# Altium PCB ADA.PcbDoc (part 2 of 3)
Units mm, origin at the board's own origin, x right, y up, seen from the top; angles counter-clockwise.
Board outline 200 x 100 mm, 2 copper layers (Top Layer, Bottom Layer); 139 components, 141 nets, 517 pads, 145 vias.
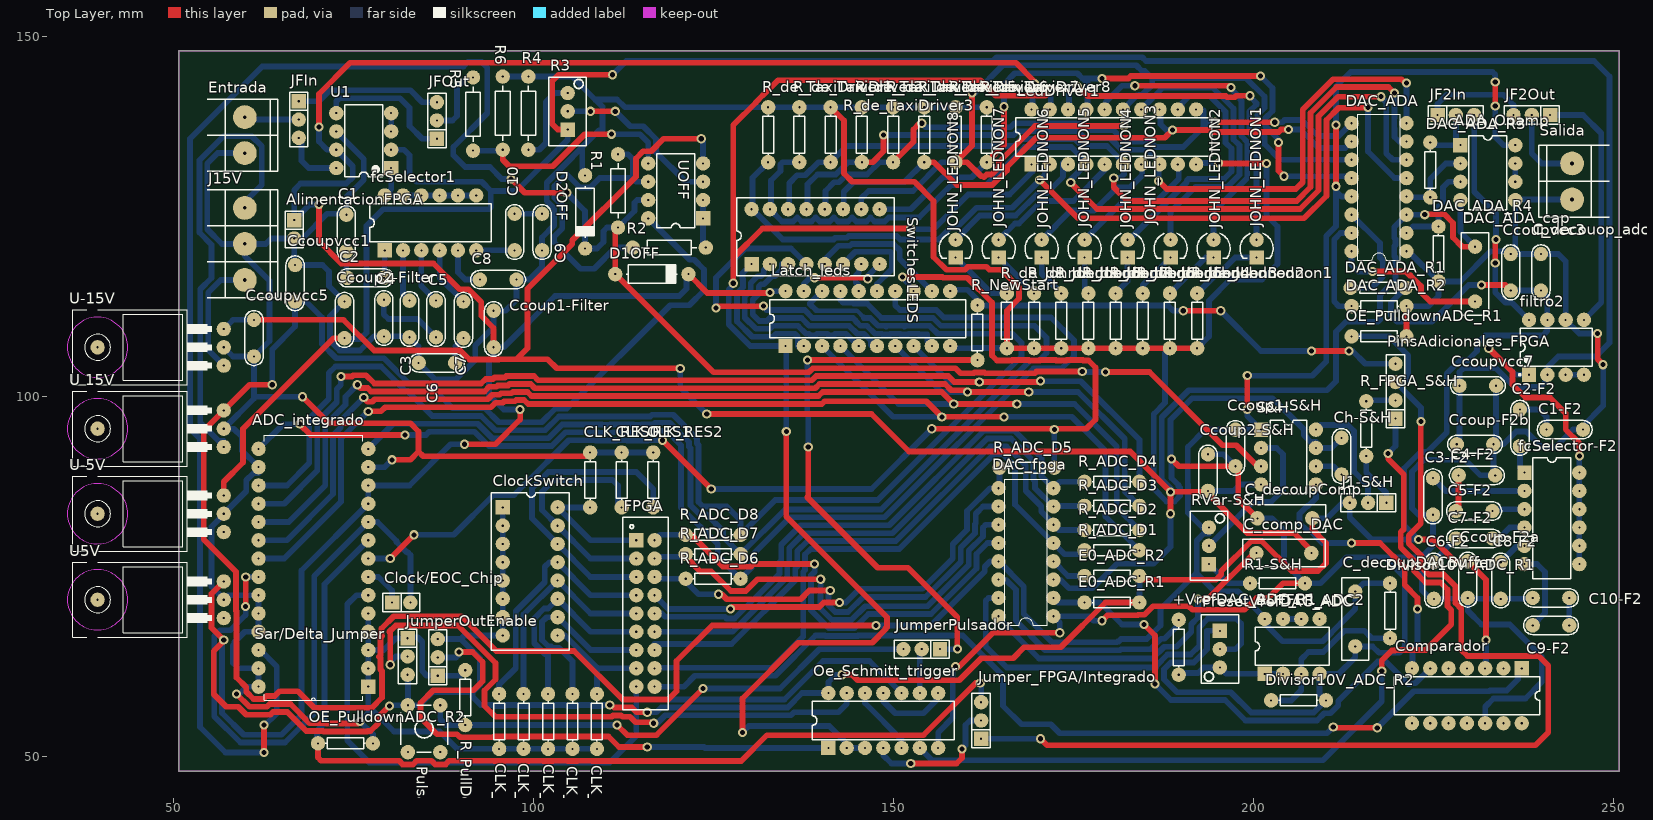
[diagram p0: Top Layer view]

## Via types
v1: diameter 1.27, hole 0.711, Top Layer to Bottom Layer, 145 vias

## Nets (pads, with @x,y where several pads share a name; then routed paths per layer and width w, separated by ;. In a path a pad name is that pad's centre, name@x,y a point inside that pad or via, vN(x,y) a via of type N, cw(c..) or ccw(c..) an arc to the next point about the centre after c; other vN are vias at no path point) (continued)
FPGA_S&H: J1-S&H.1 R_FPGA_S&H.1 | length 7.6
  Bottom Layer w0.8: R_FPGA_S&H.1@215.646,91.694 215.646,89.408 218.44,86.614 J1-S&H.1@218.44,85.217